# Altium PCB HORNET_MOTOR_CONTROLLER_PCB.PcbDoc
Units mil, origin at the board's own origin, x right, y up, seen from the top; angles counter-clockwise.
Board outline 6000 x 4000 mil, 2 copper layers (Top Layer, Bottom Layer); 61 components, 39 nets, 259 pads, 0 vias.
Unrouted connection lines stored in the file: 148.
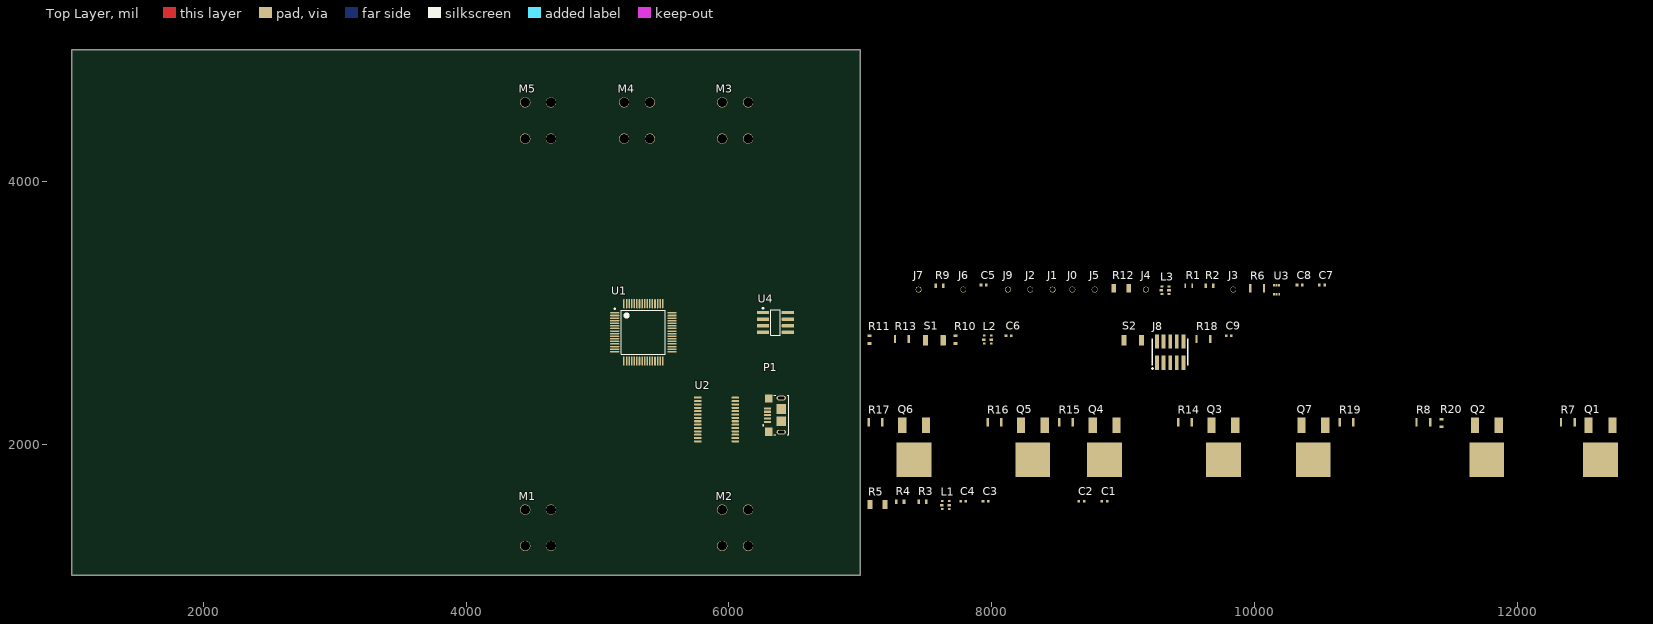
[diagram p0: Top Layer view]
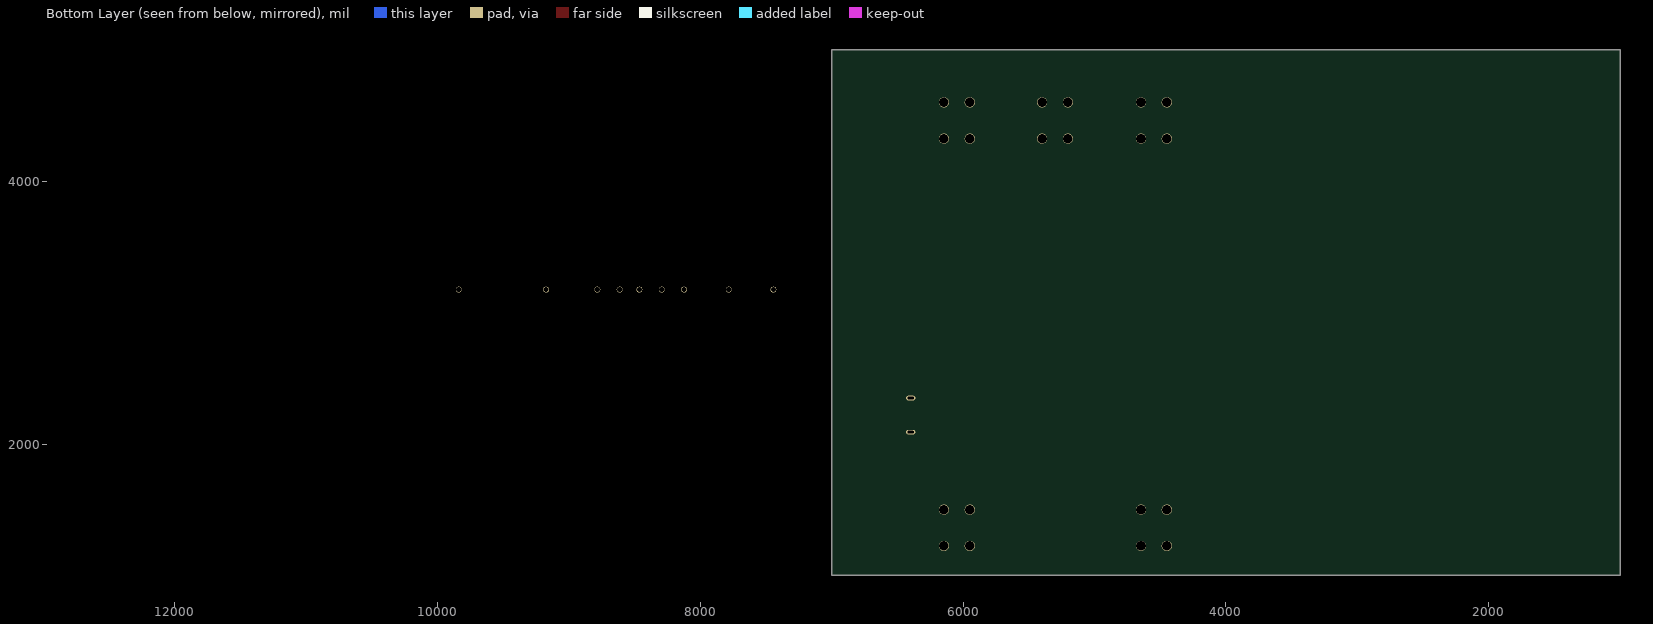
[diagram p1: Bottom Layer view, seen from below]

## Layer stack, top to bottom
Top Solder: solder mask 0.4, Solder Resist, Dk 3.5
Top Layer: signal copper 1.4
Dielectric 1: dielectric 12.6, FR-4, Dk 4.8
Bottom Layer: signal copper 1.4
Bottom Solder: solder mask 0.4, Solder Resist, Dk 3.5

## Board outline
1000,1000 7000,1000 7000,5000 1000,5000

## Design rules (kind name [scope] priority, off if disabled: settings)
Clearance [All] p1: gap=10 ignorepadtopadclearanceinfootprint=FALSE except(0: Arc-Hole Track-Hole SMDPad-Hole THPad-Hole Via-Hole Fill-Hole Poly-Hole Region-Hole Text-Hole)
DiffPairsRouting [All] p1: maxlimit=10 minlimit=10 mostfreqgap=10 toplayer_minwidth=15 toplayer_maxwidth=15 toplayer_prefwidth=15 bottomlayer_minwidth=15 bottomlayer_maxwidth=15 bottomlayer_prefwidth=15 maxuncoupledlength=500
PolygonConnect [All] p1: connectstyle=Relief reliefconductorwidth=10 reliefentries=4 polygonreliefangle="90 Angle" airgapwidth=10
RoomDefinition "SH4 - PWM + CAN" [InComponentClass('SH4 - PWM + CAN')] p1: confinementstyle=ConfineIn formatcopy=TRUE lockcomponents=FALSE outline 0,0 2000,0 2000,1000 0,1000
RoomDefinition "SH3 - Debug Communication" [InComponentClass('SH3 - Debug Communication')] p2: confinementstyle=ConfineIn formatcopy=TRUE lockcomponents=FALSE outline 0,0 2000,0 2000,1000 0,1000
RoomDefinition "SH2 - HBridge" [InComponentClass('SH2 - HBridge')] p3: confinementstyle=ConfineIn formatcopy=TRUE lockcomponents=FALSE outline 0,0 2000,0 2000,1000 0,1000
RoomDefinition "SH1 - STM32" [InComponentClass('SH1 - STM32')] p4: confinementstyle=ConfineIn formatcopy=TRUE lockcomponents=FALSE outline 0,0 2000,0 2000,1000 0,1000
RoutingVias [All] p1: holewidth=28 width=50 viastyle="Through Hole" minholewidth=28 minwidth=50 maxholewidth=28 maxwidth=50
SolderMaskExpansion [All] p1: expansion=4 istentingtop=FALSE
Width [All] p1: maxlimit=10 minlimit=10 preferedwidth=10
29 further rules are at their usual default settings.

## Classes and differential pairs
component class "SH4 - PWM + CAN": C5 C7 C8 J0 J1 J2 J3 J4 J5 J6 J7 J9 L3 R1 R2 R6 R9 R12 U3 U4
component class "SH3 - Debug Communication": C6 C9 J8 L2 P1 R10 R11 R13 R18 S1 S2 U2
component class "SH2 - HBridge": M1 M2 M3 M4 M5 Q1 Q2 Q3 Q4 Q5 Q6 Q7 R7 R8 R14 R15 R16 R17 R19 R20
component class "SH1 - STM32": C1 C2 C3 C4 L1 R3 R4 R5 U1
differential pair CAN: +CAN_P -CAN_N

## Components (designator, comment, footprint, x,y, rotation, side; value= is the part's Value field where it differs from the comment)
C1 "CAP 0.1uF" CAP0.1uF 8850,1565 r0 top
C2 "CAP 0.1uF" CAP0.1uF 8675,1565 r0 top
C3 "CAP 0.1uF" CAP0.1uF 7945,1565 r0 top
C4 "CAP 0.1uF" CAP0.1uF 7775,1565 r0 top
C5 "CAP 0.1uF" CAP0.1uF 7930,3210 r0 top
C6 "CAP 0.1uF" CAP0.1uF 8120,2825 r0 top
C7 "CAP 0.1uF" CAP0.1uF 10505,3210 r0 top
C8 "CAP 0.1uF" CAP0.1uF 10335,3210 r0 top
C9 "CAP 0.1uF" CAP0.1uF 9795,2825 r0 top
J0 "ENCODER IN 1" PIN_HEADER 8615,3175 r0 top
J1 "ENCODER IN 2" PIN_HEADER 8465,3175 r0 top
J2 "ENCODER 5V OUT" PIN_HEADER 8295,3175 r0 top
J3 "PWM Signal" PIN_HEADER 9840,3175 r0 top
J4 "5V" PIN_HEADER 9175,3175 r0 top
J5 "GND" PIN_HEADER 8785,3175 r0 top
J6 "CAN H" PIN_HEADER 7785,3175 r0 top
J7 "CAN L" PIN_HEADER 7445,3175 r0 top
J8 "CON_STM32_PROGRAMMING" FTSH-105-01-F-DV-K-P-TR 9360,2700 r0 top
J9 "ENCODER GND" PIN_HEADER 8125,3175 r0 top
L1 "RGB LED" UHD1110-FKA-CL1A13R3Q1BBQFMF3 7625,1565 r0 top
L2 "RGB LED" UHD1110-FKA-CL1A13R3Q1BBQFMF3 7945,2825 r0 top
L3 "Power LED" UHD1110-FKA-CL1A13R3Q1BBQFMF3 9296.85,3200 r0 top
M1 "Screw Motor Terminal" 8191 4450,1500 r0 top
M2 "Screw Motor Terminal" 8191 5950,1500 r0 top
M3 "Motor +" 8191 5950,4600 r0 top
M4 "Motor -" 8191 5203.15,4600 r0 top
M5 "Motor S" 8191 4450,4600 r0 top
P1 "Micro Type B" FCI_10118193-0001LF 6347.34,2220.08 r90 top
Q1 "24A 60V" STD20NF06LT4 12635,1880 r90 top
Q2 "24A 60V" STD20NF06LT4 11770,1880 r90 top
Q3 "24A 60V" STD20NF06LT4 9765,1880 r90 top
Q4 "24A 60V" STD20NF06LT4 8860,1880 r90 top
Q5 "24A 60V" STD20NF06LT4 8315,1880 r90 top
Q6 "24A 60V" STD20NF06LT4 7410,1880 r90 top
Q7 "24A 60V" STD20NF06LT4 10450,1880 r90 top
R1 "RES 10Ω" RE0603FRE0710RL 9475,3205 r0 top
R2 "RES 20Ω" SDR03EZPJ200 9630,3205 r0 top
R3 "RES 20Ω" SDR03EZPJ200 7445,1560 r0 top
R4 "RES 20Ω" SDR03EZPJ200 7275,1560 r0 top
R5 "RES 68Ω" CRCW120668R0JNEAC 7075,1540 r0 top
R6 "RES 10k Ω" 13-RE1206FRE0710KLCT-ND 9970,3185 r0 top
R7 "RES 10k Ω" 13-RE1206FRE0710KLCT-ND 12335,2165 r0 top
R8 "RES 10k Ω" 13-RE1206FRE0710KLCT-ND 11235,2165 r0 top
R9 "RES 120Ω" SDR03EZPJ200 7575,3205 r0 top
R10 "RES 20Ω" SDR03EZPJ200 7725,2765 r90 top
R11 "RES 20Ω" SDR03EZPJ200 7070,2765 r90 top
R12 "RES 68Ω" CRCW120668R0JNEAC 8930,3185 r0 top
R13 "RES 10k Ω" 13-RE1206FRE0710KLCT-ND 7265,2800 r0 top
R14 "RES 10k Ω" 13-RE1206FRE0710KLCT-ND 9420,2165 r0 top
R15 "RES 10k Ω" 13-RE1206FRE0710KLCT-ND 8515,2165 r0 top
R16 "RES 10k Ω" 13-RE1206FRE0710KLCT-ND 7970,2165 r0 top
R17 "RES 10k Ω" 13-RE1206FRE0710KLCT-ND 7065,2165 r0 top
R18 "RES 10k Ω" 13-RE1206FRE0710KLCT-ND 9560,2800 r0 top
R19 "RES 10k Ω" 13-RE1206FRE0710KLCT-ND 10650,2165 r0 top
R20 "RES 120" SDR03EZPJ200 11425,2130 r90 top
S1 "SW_SPST_NO" B3U-1000P 7565,2790 r0 top
S2 "SW_SPST_NO" B3U-1000P 9075,2790 r0 top
U1 "STM32F446RET6" STM_LQFP64_N 5350,2850 r0 top
U2 "FT232RL" FT232RL 5764.57,2352.36 r0 top
U3 "5.5v MAX" 74LVC1T45Z6-7 10150,3140 r0 top
U4 "IC_CAN_TRANSCEIVER" LT-S8_N 6261.02,3000 r0 top

## Footprints (in the part's own frame and the unit in brackets; to place one, negate y for a bottom-side part, rotate by r counter-clockwise, add the part's x,y. Pads: shape width x height; smd on the part's side, far side on the other; paste and mask are expansions set on the pad)
13-RE1206FRE0710KLCT-ND [mm]
  rect 0.45x1.6 smd: 1(0,0) 2(2.65,0)
  body extent -0.15,-0.8 2.95,0.8, height 0.65
74LVC1T45Z6-7 [mm]
  rrect50% 0.35x0.5 smd: 1(0,0)
  rect 0.35x0.5 smd: 2(0.5,0) 3(1,0)
  rect 0.375x0.5 smd: 4(0,1.7) 5(0.5,1.7) 6(1,1.7)
8191 [mm]
  round 2 hole 1.85: 1(0,-7.01) 1(0,0) 1(5,-7.01) 1(5,0)
  body extent -1.52,-8.12 6.48,1.01, height 8.2
B3U-1000P [mm] "TACTILE SWITCH GREY"
  rrect15% 1x2 smd: 1(-1.7,0) 2(1.7,0)
  body extent -2,-1.25 2,1.25, height 1.6
CAP0.1uF [mm]
  rect 0.5x0.5 smd: 1(-0.254,0) 2(0.762,0)
  body extent -0.25,-0.25 0.75,0.3, height 0.48
CRCW120668R0JNEAC [mm]
  rect 0.9x1.7 smd: 1(0,0) 2(2.9,0)
  body extent -0.13,-0.77 2.92,0.78, height 0.65
FCI_10118193-0001LF [mm]
  rect 0.4x1.35 smd: 1(-1.3,1.338) 2(-0.65,1.338) 3(0,1.338) 4(0.65,1.338) 5(1.3,1.338)
  rect 1.6x1.4 smd: S1(-3.2,1.112) S2(3.2,1.112)
  rect 1.9x1.9 smd: S3(1.2,-1.338) S4(-1.2,-1.338)
  oval 0.9x1.8 hole 0.5 slot 1.2 at 90 deg: S5(-3.3,-1.338) S6(3.3,-1.338)
  round 0.5 hole 0.5 unplated: ""(-3.3,-1.338) ""(3.3,-1.338)
  silkscreen extent -3.8,-2.79 3.8,2.26, body extent -3.94,-4.07 3.92,1.64, height 2.8
FT232RL [mm]
  rect 1.5x0.4 smd: 1(0,0)
  oval 1.5x0.4 smd: 2(0,-0.65) 3(0,-1.3) 4(0,-1.95) 5(0,-2.6) 6(0,-3.25) 7(0,-3.9) 8(0,-4.55) 9(0,-5.2) 10(0,-5.85) 11(0,-6.5) 12(0,-7.15) 13(0,-7.8) 14(0,-8.45) 15(7.25,-8.45) 16(7.25,-7.8) 17(7.25,-7.15) 18(7.25,-6.5) 19(7.25,-5.85) 20(7.25,-5.2) 21(7.25,-4.55) 22(7.25,-3.9) 23(7.25,-3.25) 24(7.25,-2.6) 25(7.25,-1.95) 26(7.25,-1.3) 27(7.25,-0.65) 28(7.25,0)
  body extent -0.09,-9.31 7.71,0.89, height 2
FTSH-105-01-F-DV-K-P-TR [mil] "Samtec programming header 10 positions"
  rect 29x110 smd mask+2: 1(-100,-80) 2(-100,80) 3(-50,-80) 4(-50,80) 5(0,-80) 6(0,80) 7(50,-80) 8(50,80) 9(100,-80) 10(100,80)
  silkscreen extent -140,-130 135,100, body extent -125,-115 125,115, height 241
LT-S8_N [mm] "SOP, 8-Leads, Body 4.9x3.9mm, Pitch 1.27mm, IPC Medium Density"
  rect 2.375x0.625 smd: 1(0,0)
  rrect20% 2.375x0.625 smd: 2(0,-1.27) 3(0,-2.54) 4(0,-3.81) 5(4.8,-3.81) 6(4.8,-2.54) 7(4.8,-1.27) 8(4.8,0)
  silkscreen extent -0.12,-4.41 3.3,0.97, body extent -0.51,-4.31 5.27,0.6, height 1.45
PIN_HEADER [mil]
  round 45 hole 39.37: 1(0,0)
  body extent -50,-51 50,49, height 330
RE0603FRE0710RL [mm]
  rect 0.25x0.8 smd: 1(0,0) 2(1.35,0)
  body extent -0.14,-0.4 1.46,0.4, height 0.55
SDR03EZPJ200 [mm]
  rect 0.5x0.8 smd: 1(0,0) 2(1.5,0)
  body extent -0.04,-0.4 1.56,0.4, height 0.55
STD20NF06LT4 [mm]
  rect 3x1.6 smd: 1(6.65,-2.3) 3(6.65,2.3)
  rect 6.7x6.7 smd: 2(0,0)
STM_LQFP64_N [mm] "Thin QFP, 64-Leads, Body 10x10mm, Pitch 0.5mm, IPC Medium Density"
  oval 1.8x0.3 smd mask+0.05: 1(-5.55,3.75) 2(-5.55,3.25) 3(-5.55,2.75) 4(-5.55,2.25) 5(-5.55,1.75) 6(-5.55,1.25) 7(-5.55,0.75) 8(-5.55,0.25) 9(-5.55,-0.25) 10(-5.55,-0.75) 11(-5.55,-1.25) 12(-5.55,-1.75) 13(-5.55,-2.25) 14(-5.55,-2.75) 15(-5.55,-3.25) 16(-5.55,-3.75) 33(5.55,-3.75) 34(5.55,-3.25) 35(5.55,-2.75) 36(5.55,-2.25) 37(5.55,-1.75) 38(5.55,-1.25) 39(5.55,-0.75) 40(5.55,-0.25) 41(5.55,0.25) 42(5.55,0.75) 43(5.55,1.25) 44(5.55,1.75) 45(5.55,2.25) 46(5.55,2.75) 47(5.55,3.25) 48(5.55,3.75)
  oval 0.3x1.8 smd mask+0.05: 17(-3.75,-5.55) 18(-3.25,-5.55) 19(-2.75,-5.55) 20(-2.25,-5.55) 21(-1.75,-5.55) 22(-1.25,-5.55) 23(-0.75,-5.55) 24(-0.25,-5.55) 25(0.25,-5.55) 26(0.75,-5.55) 27(1.25,-5.55) 28(1.75,-5.55) 29(2.25,-5.55) 30(2.75,-5.55) 31(3.25,-5.55) 32(3.75,-5.55) 49(3.75,5.55) 50(3.25,5.55) 51(2.75,5.55) 52(2.25,5.55) 53(1.75,5.55) 54(1.25,5.55) 55(0.75,5.55) 56(0.25,5.55) 57(-0.25,5.55) 58(-0.75,5.55) 59(-1.25,5.55) 60(-1.75,5.55) 61(-2.25,5.55) 62(-2.75,5.55) 63(-3.25,5.55) 64(-3.75,5.55)
  silkscreen extent -5.67,-4.25 4.25,4.7, body extent -6,-5.99 6,6.01, height 1.56
UHD1110-FKA-CL1A13R3Q1BBQFMF3 [mm]
  rrect50% 0.55x0.4 smd: 1(0,0)
  rect 0.55x0.4 smd: 5(1.35,0) 10(0,-1.487) 11(1.35,-1.487)
  rect 0.7x0.5 smd: 8(-0.127,-0.762) 9(1.373,-0.762)
  body extent -0.13,-1.56 1.47,0.04, height 0.5

## Part data
C1 C2 C3 C4 C5 C6 C7 C8 C9: "Ceramic Capacitor, Multilayer, Ceramic, 16V, 10% +Tol, 10% -Tol, X7R, 15% TC, 0.1uF, Surface Mount, 0402", Capacitance=100nF, Capacitor Type=Ceramic, Manufacturer=Murata, Manufacturer Part Number=GRM155R71C104KA88D, Max Operating Temperature=125°C, Min Operating Temperature=-55°C, Negative Tolerance=10%, Package Shape=Rectangular, Package Style=SMTMeter, Rated DC Voltage (URdc)=16V, Supplier Part Number 1=490-3261-1-ND, Temperature Characteristics Code=X7R, Category="Ceramic Capacitors", ComponentLink1Description=https://psearch.en.murata.com:443/capacitor/product/GRM155R71C104KA88%23.pdf?src-supplier=IHS+Markit, ComponentLink1URL=https://psearch.en.murata.com:443/capacitor/product/GRM155R71C104KA88%23.pdf?src-supplier=IHS+Markit, ComponentLink2Description=https://datasheet.ciiva.com/129/grm155r71c104ka88-01-129740.pdf?src-supplier=Digi-Key, ComponentLink2URL=https://datasheet.ciiva.com/129/grm155r71c104ka88-01-129740.pdf?src-supplier=Digi-Key, ComponentLink3Description=https://datasheet.ciiva.com/18102/getdatasheetpartid-85307-18102905.pdf?src-supplier=Verical, ComponentLink3URL=https://datasheet.ciiva.com/18102/getdatasheetpartid-85307-18102905.pdf?src-supplier=Verical, ComponentLink4Description=https://datasheet.ciiva.com/129/grm155r71c104ka88-01-129739.pdf?src-supplier=Digi-Key, ComponentLink4URL=https://datasheet.ciiva.com/129/grm155r71c104ka88-01-129739.pdf?src-supplier=Digi-Key, ComponentLink5Description=https://datasheet.ciiva.com/29199/454098-da-01-en-vs-kondensator-0402-29199799.pdf?src-supplier=Conrad, ComponentLink5URL=https://datasheet.ciiva.com/29199/454098-da-01-en-vs-kondensator-0402-29199799.pdf?src-supplier=Conrad, ComponentLink6Description=https://datasheet.ciiva.com/28534/4360-28534133.pdf?src-supplier=Element14, ComponentLink6URL=https://datasheet.ciiva.com/28534/4360-28534133.pdf?src-supplier=Element14, ComponentLink7Description=https://datasheet.ciiva.com/14103/grmseries-highdielectrictype-eng-14103750.pdf?src-supplier=Distrelec, ComponentLink7URL=https://datasheet.ciiva.com/14103/grmseries-highdielectrictype-eng-14103750.pdf?src-supplier=Distrelec, ComponentLink8Description=https://datasheet.ciiva.com/16199/product-16199000.pdf?src-supplier=Future+Electronics, ComponentLink8URL=https://datasheet.ciiva.com/16199/product-16199000.pdf?src-supplier=Future+Electronics, ComponentLink9Description=https://datasheet.ciiva.com/14116/grmseries-highdielectrictype-eng-14116878.pdf?src-supplier=Distrelec, ComponentLink9URL=https://datasheet.ciiva.com/14116/grmseries-highdielectrictype-eng-14116878.pdf?src-supplier=Distrelec, ComponentLink10Description=https://datasheet.ciiva.com/7937/4360-7937615.pdf?src-supplier=Element14, ComponentLink10URL=https://datasheet.ciiva.com/7937/4360-7937615.pdf?src-supplier=Element14, ComponentLink11Description=https://datasheet.ciiva.com/28534/4360-28534127.pdf?src-supplier=Element14, ComponentLink11URL=https://datasheet.ciiva.com/28534/4360-28534127.pdf?src-supplier=Element14, Dielectric Material=Ceramic, Height=0.5mm, JESD-609 Code=e3, Length=1mm, Mount="Surface Mount", Multilayer=Yes, Number of Pins=2, Packaging="Tape and Reel", Positive Tolerance=10%, Pricing 1="1=0.10000, 10=0.02100, 50=0.01140, 100=0.00930, 500=0.00666, 1000=0.00523, 2500=0.00476, 5000=0.00438 (USD)", RoHS=Yes, Size Code=0402, Stock 1=19996896, Supplier 1=Digi-Key, Terminal Finish=Nickel, Termination=Wraparound, Width=0.5mm
J0 J1 J2 J3 J4 J5 J6 J7 J9: library part PIN_HEADER, "Board Connector, 1 Contact(s), 1 Row(s), Male, Straight, Solder Terminal", Flammability Rating="UL94 V-0", Manufacturer=Sullins, Manufacturer Part Number=PREC001SAAN-RC, Supplier Part Number 1=S1012EC-01-ND, Category=Connectors, ComponentLink1Description=https://datasheet.ciiva.com:443/pdfs/VipMasterIC/IC/SUCS/SUCS-S-A0005121173/SUCS-S-A0005121173-1.pdf?src-supplier=IHS+Markit, ComponentLink1URL=https://datasheet.ciiva.com:443/pdfs/VipMasterIC/IC/SUCS/SUCS-S-A0005121173/SUCS-S-A0005121173-1.pdf?src-supplier=IHS+Markit, ComponentLink2Description=https://datasheet.ciiva.com/740/zrzczzzszzn-rc-st-11635-b-740844.pdf?src-supplier=Digi-Key, ComponentLink2URL=https://datasheet.ciiva.com/740/zrzczzzszzn-rc-st-11635-b-740844.pdf?src-supplier=Digi-Key, Connector Type="BOARD CONNECTOR", Contact Gender=Male, DIN Conformance=No, Filter Feature=No, IEC Conformance=No, MIL Conformance=No, Mixed Contacts=No, Mount=Board, Mounting Style=STRAIGHT, Number of Contacts=1, Number of Rows Loaded=1, Option="General Purpose", Pricing 1="1=0.04000, 10=0.03000, 25=0.02800, 50=0.02080, 100=0.01780, 250=0.01724, 500=0.01486 (USD)", RoHS=Yes, Stock 1=16681, Supplier 1=Digi-Key, Termination=Solder
J8: "CONN HEADER SMD 10POS 1.27MM", Manufacturer 1=Samtec, Manufacturer Part Number 1=FTSH-105-01-F-DV-K, Package/Footprint=SMD, Supplier Part Number 1=SAM8796-ND, Mounting Type=SMD, Pitch=1.27mm, Supplier 1=Digi-Key
L1 L2 L3: library part LED_RGB, "Triple Color LED", Manufacturer=Cree, Manufacturer Part Number=UHD1110-FKA-CL1A13R3Q1BBQFMF3, Supplier Part Number 1=UHD1110-FKA-CL1A13R3Q1BBQFMF3CT-ND, Category=LEDs, ComponentLink1Description=https://datasheet.ciiva.com:443/pdfs/VipMasterIC/IC/CREE/CREE-S-A0008944831/CREE-S-A0008944831-1.pdf?src-supplier=IHS+Markit, ComponentLink1URL=https://datasheet.ciiva.com:443/pdfs/VipMasterIC/IC/CREE/CREE-S-A0008944831/CREE-S-A0008944831-1.pdf?src-supplier=IHS+Markit, ComponentLink2Description=http://www.farnell.com/datasheets/2813772.pdf?src-supplier=Newark, ComponentLink2URL=http://www.farnell.com/datasheets/2813772.pdf?src-supplier=Newark, Pricing 1="1=0.10000, 10=0.06600, 100=0.06080, 1000=0.05439 (USD)", RoHS=No, Stock 1=115895, Supplier 1=Digi-Key
M1 M2 M3 M4 M5: library part "MOTOR TERMINAL", "PCB Terminal", Manufacturer="Keystone Electronics", Manufacturer Part Number=8191, Supplier Part Number 1=36-8191-ND, Category=Terminals, ComponentLink1Description=https://datasheet.ciiva.com:443/pdfs/VipMasterIC/IC/KEYC/KEYC-S-A0003063606/KEYC-S-A0003063606-1.pdf?src-supplier=IHS+Markit, ComponentLink1URL=https://datasheet.ciiva.com:443/pdfs/VipMasterIC/IC/KEYC/KEYC-S-A0003063606/KEYC-S-A0003063606-1.pdf?src-supplier=IHS+Markit, ComponentLink2Description=https://datasheet.ciiva.com/20206/33-4070e-20206385.pdf?src-supplier=Rapid+Electronics, ComponentLink2URL=https://datasheet.ciiva.com/20206/33-4070e-20206385.pdf?src-supplier=Rapid+Electronics, ComponentLink3Description=https://datasheet.ciiva.com/13540/8191-289796-13540191.pdf?src-supplier=Mouser, ComponentLink3URL=https://datasheet.ciiva.com/13540/8191-289796-13540191.pdf?src-supplier=Mouser, ComponentLink4Description=https://datasheet.ciiva.com/7628/1718241-7628730.pdf?src-supplier=Element14, ComponentLink4URL=https://datasheet.ciiva.com/7628/1718241-7628730.pdf?src-supplier=Element14, ComponentLink5Description=https://datasheet.ciiva.com/11836/0900766b800ab863-11836143.pdf?src-supplier=RSComponents, ComponentLink5URL=https://datasheet.ciiva.com/11836/0900766b800ab863-11836143.pdf?src-supplier=RSComponents, ComponentLink6Description=https://datasheet.ciiva.com/22649/1703998-22649573.pdf?src-supplier=Element14, ComponentLink6URL=https://datasheet.ciiva.com/22649/1703998-22649573.pdf?src-supplier=Element14, Pricing 1="1=0.42000, 25=0.38200, 100=0.37380, 250=0.35156, 500=0.31450 (USD)", RoHS=Yes, Stock 1=45275, Supplier 1=Digi-Key, Terminal and Terminal Block Type="PCB TERMINAL", Wire/Cable Gauge=14AWG
P1: library part "USB Connector", "USB Connector, 5 Contact(s), Female, Right Angle, Solder Terminal, Locking, Receptacle", Contact Resistance=30mR, Flammability Rating="UL94 V-0", Insulation Resistance=1GR, Manufacturer="Amphenol FCI", Manufacturer Part Number=10118193-0001LF, Manufacturer Series=10118193, Rated Current (Signal)=1.8A, Supplier Part Number 1=609-4616-1-ND, Board Mounting Option="LOCATING POSTS", Body Breadth=0.122inch, Body Depth=0.199inch, Body Length=0.309inch, Body/Shell Style=RECEPTACLE, Category="USB Connectors", ComponentLink1Description=https://datasheet.ciiva.com:443/pdfs/VipMasterIC/IC/FRCI/FRCI-S-A0000088532/FRCI-S-A0001133856-1.pdf?src-supplier=IHS+Markit, ComponentLink1URL=https://datasheet.ciiva.com:443/pdfs/VipMasterIC/IC/FRCI/FRCI-S-A0000088532/FRCI-S-A0001133856-1.pdf?src-supplier=IHS+Markit, ComponentLink2Description=https://datasheet.ciiva.com/851/10118193-851106.pdf?src-supplier=Digi-Key, ComponentLink2URL=https://datasheet.ciiva.com/851/10118193-851106.pdf?src-supplier=Digi-Key, ComponentLink3Description=https://datasheet.ciiva.com/26853/getdatasheetpartid-418618-26853893.pdf?src-supplier=Verical, ComponentLink3URL=https://datasheet.ciiva.com/26853/getdatasheetpartid-418618-26853893.pdf?src-supplier=Verical, ComponentLink4Description=https://datasheet.ciiva.com/4598/10118193ac-197151-4598799.pdf?src-supplier=Mouser, ComponentLink4URL=https://datasheet.ciiva.com/4598/10118193ac-197151-4598799.pdf?src-supplier=Mouser, ComponentLink5Description=https://datasheet.ciiva.com/14802/10118193-0001lf-webpage-14802386.pdf?src-supplier=Arrow+Electronics, ComponentLink5URL=https://datasheet.ciiva.com/14802/10118193-0001lf-webpage-14802386.pdf?src-supplier=Arrow+Electronics, ComponentLink6Description=https://datasheet.ciiva.com/851/10118193-851107.pdf?src-supplier=Digi-Key, ComponentLink6URL=https://datasheet.ciiva.com/851/10118193-851107.pdf?src-supplier=Digi-Key, ComponentLink7Description=https://datasheet.ciiva.com/851/10118193-851108.pdf?src-supplier=Digi-Key, ComponentLink7URL=https://datasheet.ciiva.com/851/10118193-851108.pdf?src-supplier=Digi-Key, ComponentLink8Description=https://datasheet.ciiva.com/14618/70236827-14618887.pdf?src-supplier=Allied+Electronics, ComponentLink8URL=https://datasheet.ciiva.com/14618/70236827-14618887.pdf?src-supplier=Allied+Electronics, Connector Type="TELECOM AND DATACOM CONNECTOR", Contact Finish - Mating="GOLD (30) OVER NICKEL", Contact Finish - Termination="GOLD FLASH OVER NICKEL", Contact Gender=Female, Contact Material="Copper Alloy", Contact Style=USB, DIN Conformance=No, Durability=10000Cycles, Empty Shell=No, Filter Feature=No, IEC Conformance=No, Insertion Force-Max=35.1392N, Insulation Material=Polymer, JESD-609 Code=e4, Mating Information="MULTIPLE MATING PARTS AVAILABLE", MIL Conformance=No, Mixed Contacts=No, Mount=Board, Mounting Option 1=LOCKING, Mounting Style="RIGHT ANGLE", Number Of Connectors=1, Number of Contacts=5, Number Of PCB Rows=1, Option="General Purpose", PCB Contact Pattern=RECTANGULAR, Plating Thickness=30uin, Polarization Key="POLAR PIN POSITION", Pricing 1="1=0.45000, 10=0.43000, 25=0.36840, 50=0.31320, 100=0.30090, 250=0.27016, 500=0.25788 (USD)", Reference Standard=UL, Reliability=COMMERCIAL, RoHS=Yes, Shell Finish=Tin, Shell Material="Stainless Steel", Stock 1=43659, Supplier 1=Digi-Key, Terminal Pitch=0.6604mm, Termination=Solder
Q1 Q2 Q3 Q4 Q5 Q6 Q7: library part MOSFET, "Power Field-Effect Transistor, 24A I(D), 60V, 0.05ohm, 1-Element, N-Channel, Silicon, Metal-oxide Semiconductor FET, TO-252AA", Avalanche Energy Rating (Eas)=225mJ, Drain Current-Max (Abs) (ID)=24A, Drain-source On Resistance-Max=50mR, DS Breakdown Voltage-Min=60V, Manufacturer=STMicroelectronics, Manufacturer Part Number=STD20NF06LT4, Max Operating Temperature=175°C, Operating Mode="ENHANCEMENT MODE", Package Body Material=Plastic, Package Shape=Rectangular, Package Style="SMALL OUTLINEMeter", Peak Reflow Temperature (Cel)=260°C, Power Dissipation-Max (Abs)=60W, Pulsed Drain Current-Max (IDM)=96A, Supplier Part Number 1=497-5888-1-ND, Time @ Peak Reflow Temperature-Max (s)=30s, Category=MOSFETs, ComponentLink1Description=https://datasheet.ciiva.com:443/pdfs/VipMasterIC/IC/SGST/SGSTS16849/SGSTS16849-1.pdf?src-supplier=IHS+Markit, ComponentLink1URL=https://datasheet.ciiva.com:443/pdfs/VipMasterIC/IC/SGST/SGSTS16849/SGSTS16849-1.pdf?src-supplier=IHS+Markit, ComponentLink2Description=https://datasheet.ciiva.com/5774/129580-5774199.pdf?src-supplier=Farnell, ComponentLink2URL=https://datasheet.ciiva.com/5774/129580-5774199.pdf?src-supplier=Farnell, ComponentLink3Description=https://datasheet.ciiva.com/4442/cd00003407-43085-4442056.pdf?src-supplier=Mouser, ComponentLink3URL=https://datasheet.ciiva.com/4442/cd00003407-43085-4442056.pdf?src-supplier=Mouser, ComponentLink4Description=https://datasheet.ciiva.com/25625/0900766b810e88d3-25625611.pdf?src-supplier=RSComponents, ComponentLink4URL=https://datasheet.ciiva.com/25625/0900766b810e88d3-25625611.pdf?src-supplier=RSComponents, ComponentLink5Description=https://datasheet.ciiva.com/46451/1398479-46451621.pdf?src-supplier=Jameco, ComponentLink5URL=https://datasheet.ciiva.com/46451/1398479-46451621.pdf?src-supplier=Jameco, ComponentLink6Description=https://datasheet.ciiva.com/16220/cd00003407-16220218.pdf?src-supplier=Future+Electronics, ComponentLink6URL=https://datasheet.ciiva.com/16220/cd00003407-16220218.pdf?src-supplier=Future+Electronics, ComponentLink7Description=https://datasheet.ciiva.com/17320/cd00003407-17320843.pdf?src-supplier=Avnet+Europe, ComponentLink7URL=https://datasheet.ciiva.com/17320/cd00003407-17320843.pdf?src-supplier=Avnet+Europe, ComponentLink8Description=https://datasheet.ciiva.com/937/cd00003407-937437.pdf?src-supplier=Digi-Key, ComponentLink8URL=https://datasheet.ciiva.com/937/cd00003407-937437.pdf?src-supplier=Digi-Key, ComponentLink9Description=https://datasheet.ciiva.com/937/cd00003407-937438.pdf?src-supplier=Digi-Key, ComponentLink9URL=https://datasheet.ciiva.com/937/cd00003407-937438.pdf?src-supplier=Digi-Key, ComponentLink10Description=https://datasheet.ciiva.com/937/cd00003407-937439.pdf?src-supplier=Digi-Key, ComponentLink10URL=https://datasheet.ciiva.com/937/cd00003407-937439.pdf?src-supplier=Digi-Key, Drain Current-Max (ID)=24A, FET Technology="METAL-OXIDE SEMICONDUCTOR", JEDEC-95 Code=TO-252AA, JESD-30 Code=R-PSSO-G2, JESD-609 Code=e3, Moisture Sensitivity Level=1, Number of Elements=1, Number of Pins=2, Polarity/Channel Type=N-CHANNEL, Pricing 1="1=0.99000, 10=0.81000, 25=0.79520, 100=0.63000, 500=0.53400, 1000=0.43500 (USD)", Qualification Status="Not Qualified", RoHS=Yes, Stock 1=17979, Supplier 1=Digi-Key, Surface Mount=Yes, Terminal Finish=Tin, Terminal Form="Gull Wing", Terminal Position=SINGLE, Transistor Application=SWITCHING, Transistor Element Material=SILICON
R1: "Fixed Resistor, Metal Glaze/thick Film, 0.1W, 10ohm, 75V, 1% +/-Tol, 50ppm/Cel, Surface Mount, 0603", Manufacturer=Yageo, Manufacturer Part Number=RE0603FRE0710RL, Max Operating Temperature=155°C, Min Operating Temperature=-55°C, Package Height=0.45mm, Package Length=1.6mm, Package Style=SMTMeter, Package Width=0.8mm, Rated Power Dissipation (P)=100mW, Rated Temperature=70°C, Resistance=10R, Resistor Type="FIXED RESISTOR", Supplier Part Number 1=13-RE0603FRE0710RLCT-ND, Temperature Coefficient=50ppm/°C, Tolerance=1%, Working Voltage=75V, Category="Chip SMD Resistors", ComponentLink1Description=https://datasheet.ciiva.com:443/pdfs/VipMasterIC/IC/YAGO/YAGO-S-A0003975721/YAGO-S-A0003975721-1.pdf?src-supplier=IHS+Markit, ComponentLink1URL=https://datasheet.ciiva.com:443/pdfs/VipMasterIC/IC/YAGO/YAGO-S-A0003975721/YAGO-S-A0003975721-1.pdf?src-supplier=IHS+Markit, ComponentLink2Description=http://www.yageo.com/NewPortal/yageodocoutput?fileName=/pdf/R-Chip/PYu-RE_105_RoHS_L_4.pdf&src-supplier=Digi-Key, ComponentLink2URL=http://www.yageo.com/NewPortal/yageodocoutput?fileName=/pdf/R-Chip/PYu-RE_105_RoHS_L_4.pdf&src-supplier=Digi-Key, Construction=Rectangular, JESD-609 Code=e3, Mount="Surface Mount", Number of Pins=2, Packaging="Tape and Reel", Pricing 1="1=0.10000, 10=0.05500, 100=0.02240, 1000=0.01007, 2500=0.00874 (USD)", RoHS=Yes, Size Code=0603, Stock 1=8567, Supplier 1=Digi-Key, Technology="METAL GLAZE/THICK FILM", Terminal Finish=Nickel, Termination=Wraparound
R2 R3 R4 R10 R11: "Fixed Resistor, 0.1W, 20ohm, 50V, 5% +/-Tol, 200ppm/Cel, Surface Mount, 0603", Manufacturer=Rohm, Manufacturer Part Number=SDR03EZPJ200, Max Operating Temperature=155°C, Min Operating Temperature=-55°C, Package Shape=Rectangular, Rated Power Dissipation (P)=100mW, Rated Temperature=70°C, Resistance=20R, Resistor Type="FIXED RESISTOR", Supplier Part Number 1=511-1747-1-ND, Temperature Coefficient=200ppm/°C, Tolerance=5%, Working Voltage=50V, Additional Feature=ANTI-SULFUR, Category="Chip SMD Resistors", ComponentLink1Description=https://datasheet.ciiva.com:443/pdfs/VipMasterIC/IC/ROHM/ROHM-S-A0002832543/ROHM-S-A0002832543-1.pdf?src-supplier=IHS+Markit, ComponentLink1URL=https://datasheet.ciiva.com:443/pdfs/VipMasterIC/IC/ROHM/ROHM-S-A0002832543/ROHM-S-A0002832543-1.pdf?src-supplier=IHS+Markit, ComponentLink2Description=https://www.rohm.com/datasheet/SDR03EZPJ/sdr-e?src-supplier=Digi-Key, ComponentLink2URL=https://www.rohm.com/datasheet/SDR03EZPJ/sdr-e?src-supplier=Digi-Key, Mount="Surface Mount", Number of Pins=2, Packaging="Tape and Reel", Pricing 1="1=0.10000, 10=0.07300, 100=0.02800, 1000=0.01232, 2500=0.01064 (USD)", Reference Standard="TS 16949", RoHS=No, Size Code=0603, Stock 1=3900, Supplier 1=Digi-Key, Termination=Wraparound
R5 R12: "VISCRCW120668R0JNEAC Res Thick Film 1206", Manufacturer=Vishay, Manufacturer Part Number=CRCW120668R0JNEAC, Max Operating Temperature=155°C, Min Operating Temperature=-55°C, Package Height=0.55mm, Package Length=3.05mm, Package Style=SMTMeter, Package Width=1.55mm, Rated Power Dissipation (P)=250mW, Resistance=68R, Resistor Type="FIXED RESISTOR", Supplier Part Number 1=541-CRCW120668R0JNEACCT-ND, Temperature Coefficient=-200200ppm/°C, Tolerance=5%, Working Voltage=200V, ComponentLink1Description=https://datasheet.ciiva.com:443/pdfs/VipMasterIC/IC/VISH/VISH-S-A0003599164/VISH-S-A0003599164-1.pdf?src-supplier=IHS+Markit, ComponentLink1URL=https://datasheet.ciiva.com:443/pdfs/VipMasterIC/IC/VISH/VISH-S-A0003599164/VISH-S-A0003599164-1.pdf?src-supplier=IHS+Markit, Construction=Chip, JESD-609 Code=e3, Number of Pins=2, Packaging="Tape and Reel", Pricing 1="1=0.10000, 10=0.06300, 100=0.02570, 1000=0.01153, 2500=0.01000 (USD)", Size Code=1206, Stock 1=24990, Supplier 1=Digi-Key, Technology="METAL GLAZE/THICK FILM", Terminal Finish=Nickel
R6 R7 R8 R13 R14 R15 R16 R17 R18 R19: "Fixed Resistor, Metal Glaze/thick Film, 0.25W, 10000ohm, 200V, 1% +/-Tol, 50ppm/Cel, Surface Mount, 1206", Manufacturer=Yageo, Manufacturer Part Number=RE1206FRE0710KL, Supplier Part Number 1=13-RE1206FRE0710KLCT-ND, Category="Chip SMD Resistors", ComponentLink1Description=https://datasheet.ciiva.com:443/pdfs/VipMasterIC/IC/YAGO/YAGO-S-A0003975721/YAGO-S-A0003975721-1.pdf?src-supplier=IHS+Markit, ComponentLink1URL=https://datasheet.ciiva.com:443/pdfs/VipMasterIC/IC/YAGO/YAGO-S-A0003975721/YAGO-S-A0003975721-1.pdf?src-supplier=IHS+Markit, ComponentLink2Description=http://www.yageo.com/NewPortal/yageodocoutput?fileName=/pdf/R-Chip/PYu-RE_105_RoHS_L_4.pdf&src-supplier=Digi-Key, ComponentLink2URL=http://www.yageo.com/NewPortal/yageodocoutput?fileName=/pdf/R-Chip/PYu-RE_105_RoHS_L_4.pdf&src-supplier=Digi-Key, Pricing 1="1=0.10000, 10=0.05900, 100=0.02390, 1000=0.01073, 2500=0.00932 (USD)", RoHS=Yes, Stock 1=6708, Supplier 1=Digi-Key
R9: library part "RES 120", "Fixed Resistor, 0.1W, 120ohm, 50V, 5% +/-Tol, 200ppm/Cel, Surface Mount, 0603", Manufacturer=Rohm, Manufacturer Part Number=SDR03EZPJ121, Supplier Part Number 1=511-1735-1-ND, Category="Chip SMD Resistors", ComponentLink1Description=https://datasheet.ciiva.com:443/pdfs/VipMasterIC/IC/ROHM/ROHM-S-A0002832543/ROHM-S-A0002832543-1.pdf?src-supplier=IHS+Markit, ComponentLink1URL=https://datasheet.ciiva.com:443/pdfs/VipMasterIC/IC/ROHM/ROHM-S-A0002832543/ROHM-S-A0002832543-1.pdf?src-supplier=IHS+Markit, ComponentLink2Description=https://www.rohm.com/datasheet/SDR03EZPJ/sdr-e?src-supplier=Digi-Key, ComponentLink2URL=https://www.rohm.com/datasheet/SDR03EZPJ/sdr-e?src-supplier=Digi-Key, Pricing 1="1=0.10000, 10=0.07300, 100=0.02800, 1000=0.01232, 2500=0.01064 (USD)", RoHS=No, Stock 1=4798, Supplier 1=Digi-Key
R20: "Fixed Resistor, 0.1W, 120ohm, 50V, 5% +/-Tol, 200ppm/Cel, Surface Mount, 0603", Manufacturer=Rohm, Manufacturer Part Number=SDR03EZPJ121, Supplier Part Number 1=511-1735-1-ND, Category="Chip SMD Resistors", ComponentLink1Description=https://datasheet.ciiva.com:443/pdfs/VipMasterIC/IC/ROHM/ROHM-S-A0002832543/ROHM-S-A0002832543-1.pdf?src-supplier=IHS+Markit, ComponentLink1URL=https://datasheet.ciiva.com:443/pdfs/VipMasterIC/IC/ROHM/ROHM-S-A0002832543/ROHM-S-A0002832543-1.pdf?src-supplier=IHS+Markit, ComponentLink2Description=https://www.rohm.com/datasheet/SDR03EZPJ/sdr-e?src-supplier=Digi-Key, ComponentLink2URL=https://www.rohm.com/datasheet/SDR03EZPJ/sdr-e?src-supplier=Digi-Key, Pricing 1="1=0.10000, 10=0.07300, 100=0.02800, 1000=0.01232, 2500=0.01064 (USD)", RoHS=No, Stock 1=4798, Supplier 1=Digi-Key
S1 S2: "SWITCH TACTILE SPST-NO 0.05A 12V", Manufacturer 1="Omron Electronics Inc-EMC Div", Manufacturer Part Number 1=B3U-1000P, Package/Footprint=SMD, Supplier Part Number 1=SW1020CT-ND, Mounting Type=SMD, Supplier 1=Digi-Key
U1: "RISC Microcontroller, 32-Bit, FLASH, CORTEX-M4F CPU, 180MHz, CMOS, PQFP64", Manufacturer=STMicroelectronics, Max Operating Temperature=85°C, Max Supply Current=115mA, Min Operating Temperature=-40°C, Package Body Material=Plastic, Package Code=QFP, Package Equivalence Code=QFP64,.47SQ,20, Package Shape=Square, Package Style=FLATPACKMeter, Power Supplies=1.8/3.3V, Supplier Part Number 1=497-15376-ND, Temperature Grade=INDUSTRIAL, Category=Microcontrollers, ComponentLink1Description=https://datasheet.ciiva.com:443/pdfs/VipMasterIC/IC/SGST/SGST-S-A0000954157/SGST-S-A0000954273-1.pdf?src-supplier=IHS+Markit, ComponentLink1URL=https://datasheet.ciiva.com:443/pdfs/VipMasterIC/IC/SGST/SGST-S-A0000954157/SGST-S-A0000954273-1.pdf?src-supplier=IHS+Markit, ComponentLink2Description=http://www.farnell.com/datasheets/2309063.pdf?src-supplier=Farnell, ComponentLink2URL=http://www.farnell.com/datasheets/2309063.pdf?src-supplier=Farnell, ComponentLink3Description=http://www.mouser.com/ds/2/389/stm32f446mc-956216.pdf?src-supplier=Mouser, ComponentLink3URL=http://www.mouser.com/ds/2/389/stm32f446mc-956216.pdf?src-supplier=Mouser, ComponentLink4Description=http://www.farnell.com/datasheets/2309063.pdf?src-supplier=Newark, ComponentLink4URL=http://www.farnell.com/datasheets/2309063.pdf?src-supplier=Newark, ComponentLink5Description=http://www.st.com/content/ccc/resource/technical/document/datasheet/65/cb/75/50/53/d6/48/24/DM00141306.pdf/files/DM00141306.pdf/jcr:content/translations/en.DM00141306.pdf?src-supplier=Digi-Key, ComponentLink5URL=http://www.st.com/content/ccc/resource/technical/document/datasheet/65/cb/75/50/53/d6/48/24/DM00141306.pdf/files/DM00141306.pdf/jcr:content/translations/en.DM00141306.pdf?src-supplier=Digi-Key, ComponentLink6Description=http://www.farnell.com/datasheets/2309063.pdf?src-supplier=Element14, ComponentLink6URL=http://www.farnell.com/datasheets/2309063.pdf?src-supplier=Element14, JESD-30 Code=S-PQFP-G64, Manufacturer Part Number=STM32F446RET6, Number of Pins=64, Pricing 1="1=9.05000, 10=8.17300, 25=7.79320, 160=6.76675, 320=6.46266, 480=5.89242, 960=5.13210, 2400=4.94202, 4960=4.75194 (USD)", Qualification Status="Not Qualified", RoHS=Yes, Speed=180RPM, Supplier 1=Digi-Key, Surface Mount=Yes, Technology=CMOS, Terminal Form="Gull Wing", Terminal Pitch=0.5mm, Terminal Position=QUAD
U2: "USB Bus Controller, CMOS, PDSO28", Manufacturer=FTDI, Manufacturer Part Number=FT232RL-REEL, Max Frequency=48MHz, Max Operating Temperature=85°C, Max Supply Current=100uA, Max Supply Voltage=5.25V, Min Operating Temperature=-40°C, Min Supply Voltage=3.3V, Package Body Material=Plastic, Package Code=SSOP, Package Shape=Rectangular, Package Style="SMALL OUTLINE, SHRINK PITCHMeter", Supplier Part Number 1=768-1007-1-ND, Temperature Grade=INDUSTRIAL, Category="Interface ICs", ComponentLink1Description=https://datasheet.ciiva.com:443/pdfs/VipMasterIC/IC/FTDI/FTDI-S-A0007980421/FTDI-S-A0007980421-1.pdf?src-supplier=IHS+Markit, ComponentLink1URL=https://datasheet.ciiva.com:443/pdfs/VipMasterIC/IC/FTDI/FTDI-S-A0007980421/FTDI-S-A0007980421-1.pdf?src-supplier=IHS+Markit, ComponentLink2Description=https://datasheet.ciiva.com/34304/2161019-34304054.pdf?src-supplier=Jameco, ComponentLink2URL=https://datasheet.ciiva.com/34304/2161019-34304054.pdf?src-supplier=Jameco, ComponentLink3Description=https://datasheet.ciiva.com/4787/ds-ft232r-11534-4787658.pdf?src-supplier=Mouser, ComponentLink3URL=https://datasheet.ciiva.com/4787/ds-ft232r-11534-4787658.pdf?src-supplier=Mouser, ComponentLink4Description=https://datasheet.ciiva.com/26841/ft232rl-reel-26841080.pdf?src-supplier=IIIC, ComponentLink4URL=https://datasheet.ciiva.com/26841/ft232rl-reel-26841080.pdf?src-supplier=IIIC, ComponentLink5Description=https://datasheet.ciiva.com/1787/ds-ft232r-1787047.pdf?src-supplier=Digi-Key, ComponentLink5URL=https://datasheet.ciiva.com/1787/ds-ft232r-1787047.pdf?src-supplier=Digi-Key, ComponentLink6Description=https://datasheet.ciiva.com/1787/ds-ft232r-1787048.pdf?src-supplier=Digi-Key, ComponentLink6URL=https://datasheet.ciiva.com/1787/ds-ft232r-1787048.pdf?src-supplier=Digi-Key, ComponentLink7Description=https://datasheet.ciiva.com/1787/ds-ft232r-1787049.pdf?src-supplier=Digi-Key, ComponentLink7URL=https://datasheet.ciiva.com/1787/ds-ft232r-1787049.pdf?src-supplier=Digi-Key, ComponentLink8Description=https://datasheet.ciiva.com/15150/getdatasheetpartid-643207-15150506.pdf?src-supplier=Verical, ComponentLink8URL=https://datasheet.ciiva.com/15150/getdatasheetpartid-643207-15150506.pdf?src-supplier=Verical, ComponentLink9Description=https://datasheet.ciiva.com/16200/ds-ft232r-16200652.pdf?src-supplier=Future+Electronics, ComponentLink9URL=https://datasheet.ciiva.com/16200/ds-ft232r-16200652.pdf?src-supplier=Future+Electronics, Height - Seated (Max)=2mm, JESD-30 Code=R-PDSO-G28, Length=10.2mm, Moisture Sensitivity Level=3, Number of Pins=28, Pricing 1="1=4.50000, 10=4.05000, 50=3.85000, 100=3.65000, 250=3.25000, 500=2.85002, 1000=2.65000 (USD)", Qualification Status="Not Qualified", RoHS=Yes, Stock 1=118964, Supplier 1=Digi-Key, Surface Mount=Yes, Technology=CMOS, Terminal Form="Gull Wing", Terminal Pitch=0.65mm, Terminal Position=DUAL, Width=5.3mm
U3: library part "Bi-Directional Logic Converter", "Bus Transceiver, LVC/LCX/Z Series, 1-Func, 1-Bit, True Output, CMOS, PDSO6", Manufacturer=Diodes, Manufacturer Part Number=74LVC1T45Z6-7, Max Operating Temperature=125°C, Min Operating Temperature=-40°C, Package Body Material=Plastic, Package Code=VSOF, Package Shape=Rectangular, Package Style="SMALL OUTLINE, VERY THIN PROFILEMeter", Power Supplies=3.3V, Supplier Part Number 1=74LVC1T45Z6-7DICT-ND, Supply Voltage-Max (Vsup)=5.5V, Supply Voltage-Min (Vsup)=1.65V, Temperature Grade=AUTOMOTIVE, Category="Logic ICs", ComponentLink1Description=https://datasheet.ciiva.com:443/pdfs/VipMasterIC/IC/DIOD/DIOD-S-A0006644025/DIOD-S-A0006644025-1.pdf?src-supplier=IHS+Markit, ComponentLink1URL=https://datasheet.ciiva.com:443/pdfs/VipMasterIC/IC/DIOD/DIOD-S-A0006644025/DIOD-S-A0006644025-1.pdf?src-supplier=IHS+Markit, ComponentLink2Description=http://www.mouser.com/ds/2/115/74LVC1T45-318124.pdf?src-supplier=Mouser, ComponentLink2URL=http://www.mouser.com/ds/2/115/74LVC1T45-318124.pdf?src-supplier=Mouser, ComponentLink3Description=http://diodes.com/datasheets/74LVC1T45.pdf?src-supplier=Avnet, ComponentLink3URL=http://diodes.com/datasheets/74LVC1T45.pdf?src-supplier=Avnet, ComponentLink4Description=https://www.diodes.com/assets/Datasheets/74LVC1T45.pdf?src-supplier=Digi-Key, ComponentLink4URL=https://www.diodes.com/assets/Datasheets/74LVC1T45.pdf?src-supplier=Digi-Key, Control Type="COMMON CONTROL", Count Direction=Bidirectional, Height - Seated (Max)=0.6mm, JESD-30 Code=R-PDSO-F6, JESD-609 Code=e3, Load/Preset Input=Yes, Logic IC Type="BUS TRANSCEIVER", Max I(ol)=24mA, Moisture Sensitivity Level=1, Number of Bits=1, Number of Functions=1, Number of Pins=6, Number of Ports=2, Output Characteristics=3-STATE, Output Polarity=True, Packaging="Tape and Reel", Pricing 1="1=0.39000, 10=0.29300, 25=0.26400, 100=0.18240, 250=0.15360, 500=0.12480, 1000=0.09600 (USD)", Qualification Status="Not Qualified", RoHS=Yes, Stock 1=88129, Supplier 1=Digi-Key, Supply Voltage-Nom (Vsup)=3.3V, Surface Mount=Yes, Technology=CMOS, Terminal Finish=Tin, Terminal Form=Flat, Terminal Pitch=0.5mm, Terminal Position=DUAL, Width=1.2mm
U4: "IC TXRX CAN 4MBPS 8SO", LCSC Part #=C117076, Manufacturer 1="Linear Technologies", Manufacturer Part Number 1=LTC2875IS8#PBF, Package/Footprint=8-SOIC, Supplier Part Number 1=LTC2875IS8#PBF-ND, Mounting Type=SMD, Supplier 1=Digi-Key

## Nets (pads, with @x,y where several pads share a name; then routed paths per layer and width w, separated by ;. In a path a pad name is that pad's centre, name@x,y a point inside that pad or via, vN(x,y) a via of type N, cw(c..) or ccw(c..) an arc to the next point about the centre after c; other vN are vias at no path point)
3V3: C1.2 C2.2 C3.2 C4.2 C5.1 C8.2 C9.1 R1.2 R2.1 R12.2 R18.2 S1.1 U1.1 U1.13 U1.19 U1.32 U1.48 U1.64 U2.4 U2.17 U3.6 U4.3
+5: C6.1 C7.1 J2.1 J4.1 J8.10 P1.1 R1.1 R6.2 U2.20 U3.1
CAN_N: J7.1 R9.1 U4.6
CAN_P: J6.1 R9.2 U4.7
GND: C1.1 C2.1 C3.1 C4.1 C5.2 C6.2 C7.2 C8.1 C9.2 J5.1 J8.3 J8.4 J9.1 L1.1 L1.5 L2.1 L2.5 M2.1 P1.5 P1.S1 P1.S2 P1.S3 P1.S4 P1.S5 P1.S6 Q2.3 Q4.3 Q6.3 R2.2 R7.1 R8.1 R13.1 R14.1 R15.1 R16.1 R17.1 R19.1 S2.1 U1.12 U1.18 U1.31 U1.47 U1.63 U2.7 U2.18 U2.21 U2.25 U2.26 U3.2 U4.2 U4.8
NetJ0_1: J0.1 U1.8
NetJ1_1: J1.1 U1.9
NetJ3_1: J3.1 U3.3
NetJ8_1: J8.1 R18.1 S2.2 U1.7
NetJ8_2: J8.2 U1.46
NetJ8_5: J8.5 U1.50
NetJ8_6: J8.6 U1.49
NetL2_2: R11.1
NetL2_6: R10.1
NetL3_4: R12.1
NetM3_1: M3.1 Q1.3 Q2.2 R20.2
NetM4_1: M4.1 Q3.3 Q4.2 Q7.3
NetM5_1: M5.1 Q5.3 Q6.2
NetP1_2: P1.2 U2.16
NetP1_3: P1.3 U2.15
NetQ1_1: Q1.1 R7.2 U1.58
NetQ2_1: Q2.1 R8.2 U1.59
NetQ3_1: Q3.1 R14.2 U1.61
NetQ4_1: Q4.1 R15.2 U1.62
NetQ5_1: Q5.1 R16.2 U1.35
NetQ6_1: Q6.1 R17.2 U1.36
NetQ7_1: Q7.1 R19.2
NetQ7_2: Q7.2 R20.1
NetR3_2: R3.2 U1.23
NetR4_2: R4.2 U1.26
NetR5_2: R5.2 U1.37
NetR6_1: R6.1 U3.5
NetR10_2: R10.2 U1.17 U2.1
NetR11_2: R11.2 U1.16 U2.5
NetR13_2: R13.2 S1.2 U1.40
NetU1_27: U1.27 U3.4
NetU1_33: U1.33 U4.4
NetU1_34: U1.34 U4.1
POWER+: M1.1 Q1.2 Q3.2 Q5.2
pads on no net: J8.7 J8.8 J8.9 L1.8 L1.9 L1.10 L1.11 L2.8 L2.9 L2.10 L2.11 L3.1 L3.5 L3.8 L3.9 L3.10 L3.11 P1. P1.4 R3.1 R4.1 R5.1 U1.2 U1.3 U1.4 U1.5 U1.6 U1.10 U1.11 U1.14 U1.15 U1.20 U1.21 U1.22 U1.24 U1.25 U1.28 U1.29 U1.30 U1.38 U1.39 U1.41 U1.42 U1.43 U1.44 U1.45 U1.51 U1.52 U1.53 U1.54 U1.55 U1.56 U1.57 U1.60 U2.2 U2.3 U2.6 U2.8 U2.9 U2.10 U2.11 U2.12 U2.13 U2.14 U2.19 U2.22 U2.23 U2.24 U2.27 U2.28 U4.5

## Text inside footprints (layer, text, board x,y; h text height)
P1: Mechanical 13 "PCB END" at 6451.18,2407.09 h16 r90